# Altium PCB TEMP007-1P-2O.PcbDoc
Units mm, origin at the board's own origin, x right, y up, seen from the top; angles counter-clockwise.
Board outline 129.54 x 99.69 mm, 2 copper layers (Top Layer, Bottom Layer); 91 components, 48 nets, 228 pads, 19 vias.
Unrouted connection lines stored in the file: 167.
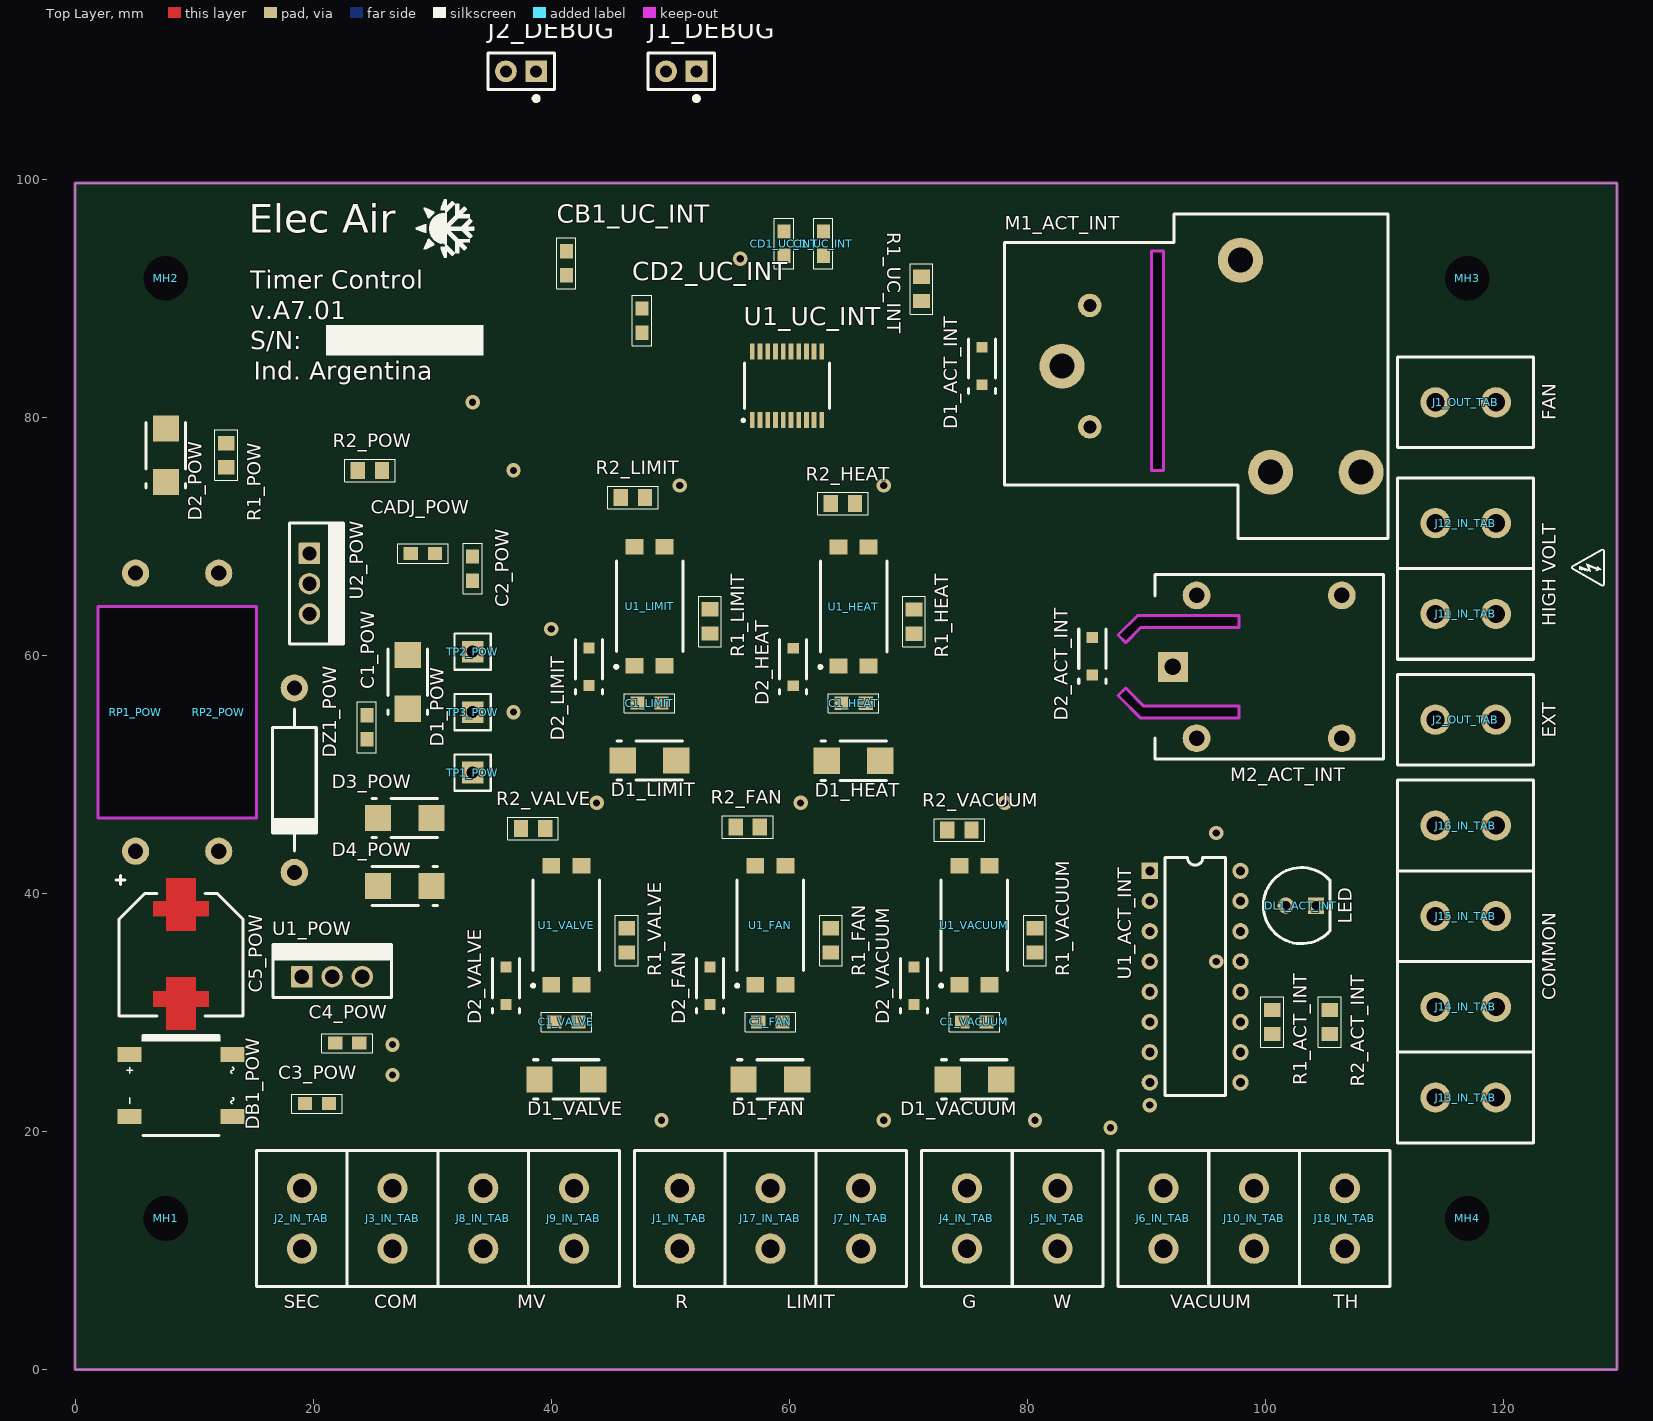
[diagram p0: Top Layer view]
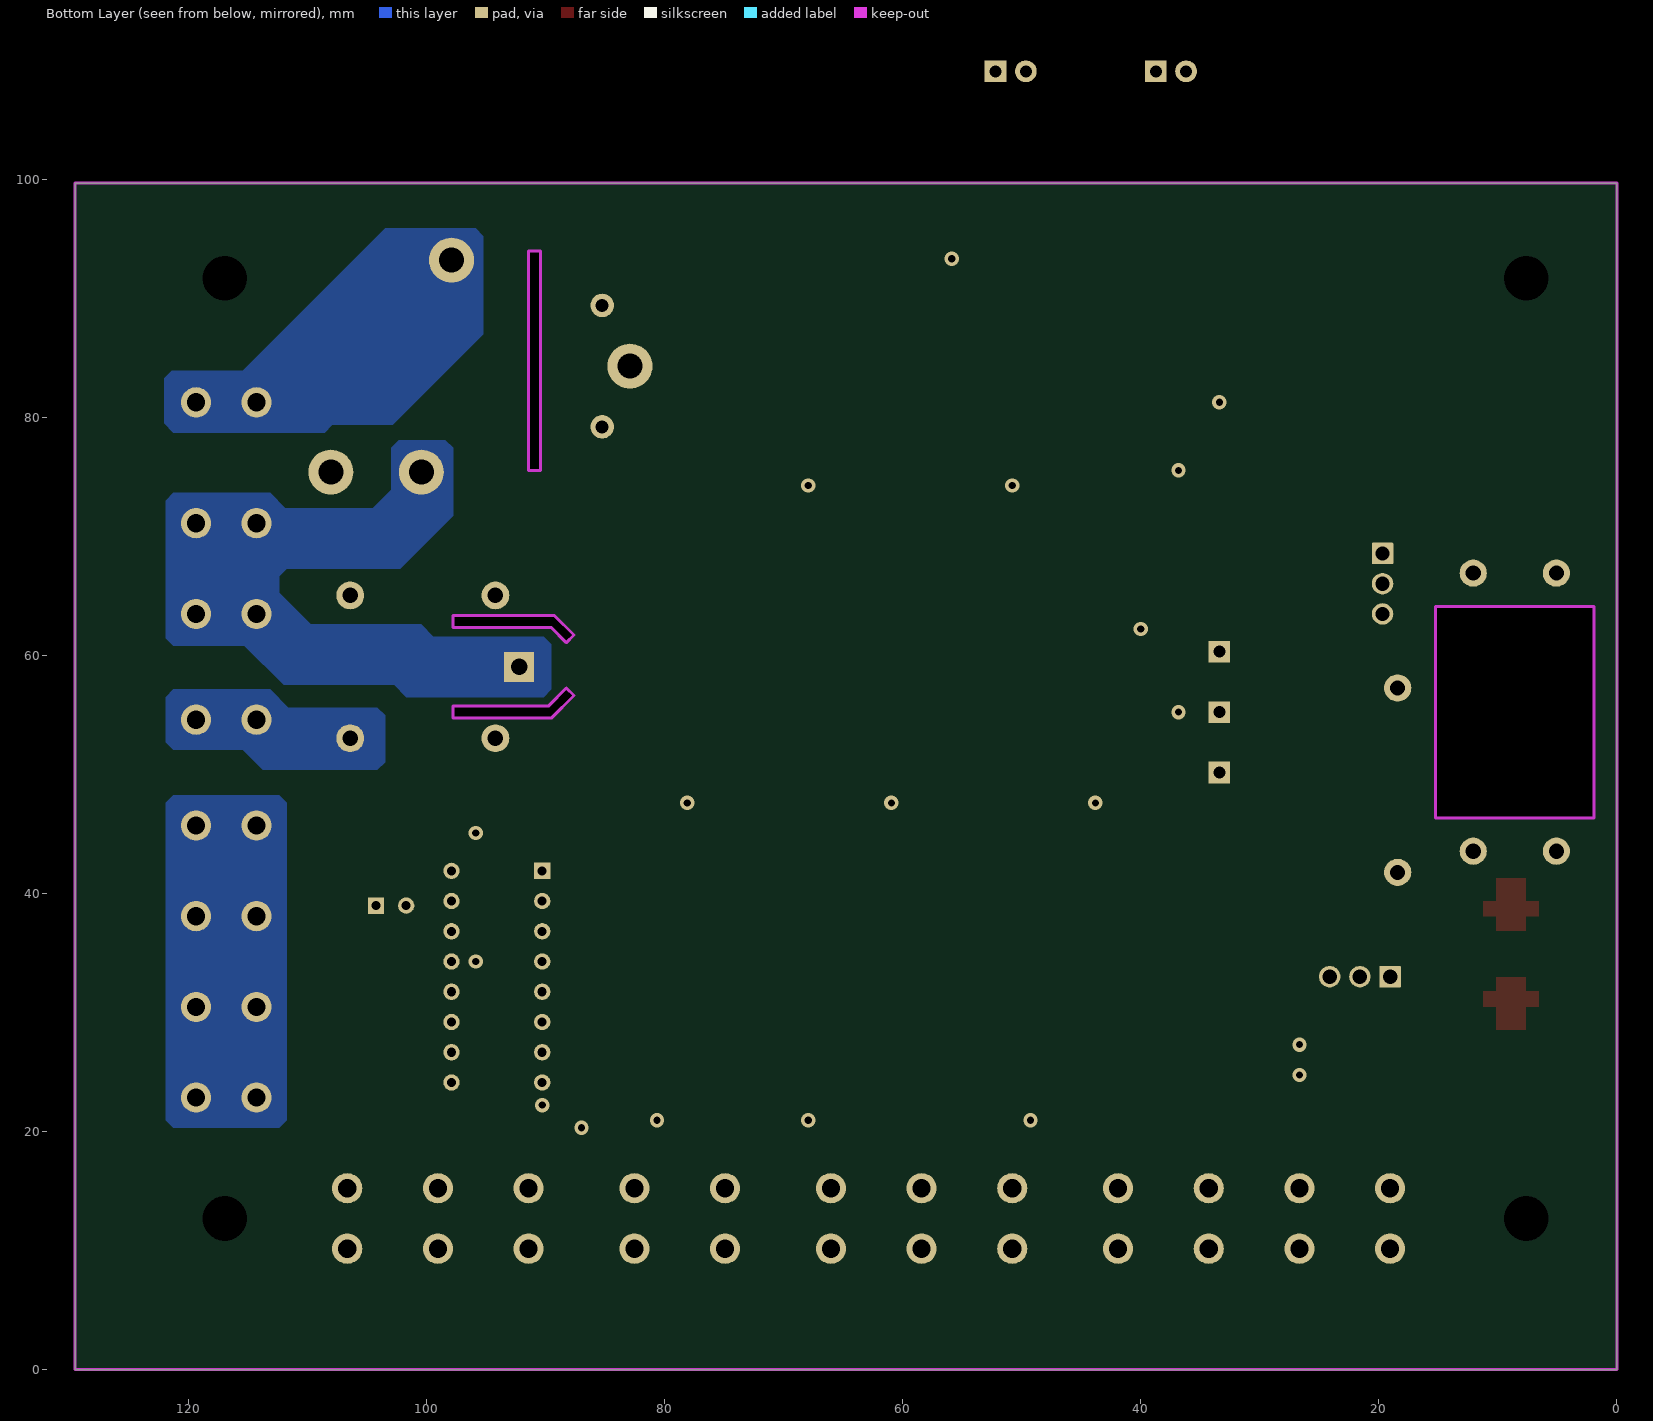
[diagram p1: Bottom Layer view, seen from below]

## Layer stack, top to bottom
Top Solder: solder mask 0.0102, Solder Resist, Dk 3.5
Top Layer: signal copper 0.0356
Dielectric 1: dielectric 0.32, FR-4, Dk 4.8
Bottom Layer: signal copper 0.0356
Bottom Solder: solder mask 0.0102, Solder Resist, Dk 3.5

## Board outline
0,0 129.54,0 129.54,99.695 0,99.695
cut-out: 88.265,61.087 89.535,62.357 97.79,62.357 97.79,63.373 89.281,63.373 87.63,61.722
cut-out: 87.63,56.642 89.535,54.737 97.79,54.737 97.79,55.753 89.789,55.753 88.265,57.277
cut-out: 90.424,75.565 90.424,93.98 91.44,93.98 91.44,75.565
cut-out: 1.905,46.355 1.905,64.135 15.24,64.135 15.24,46.355

## Design rules (kind name [scope] priority, off if disabled: settings)
BoardOutlineClearance [All] p1: gap=0.2 ignorepadtopadclearanceinfootprint=FALSE except(0.4: Arc-SplitBarrior Arc-SplitContinuation Track-SplitBarrior Track-SplitContinuation SMDPad-SplitBarrior SMDPad-SplitContinuation THPad-SplitBarrior THPad-SplitContinuation Via-SplitBarrior Via-SplitContinuation Fill-SplitBarrior Fill-SplitContinuation Poly-SplitBarrior Poly-SplitContinuation Region-SplitBarrior Region-SplitContinuation Text-SplitBarrior Text-SplitContinuation)
Clearance Clearance_Poly_Fiducials [InPolygon vs InComponentClass('Fiducials')] p1: gap=0.508 ignorepadtopadclearanceinfootprint=FALSE
Clearance Clearance_Poly_Tooling [InPolygon vs InComponentClass('Tooling')] p2: gap=0.254 ignorepadtopadclearanceinfootprint=FALSE
Clearance Clearance_Poly_THT [InPolygon vs InThruComponent] p3: gap=0.508 ignorepadtopadclearanceinfootprint=FALSE
Clearance Clearance_Poly_GRL [InPolygon vs IsVia] p4: gap=0.254 ignorepadtopadclearanceinfootprint=FALSE
Clearance "Clearance Bottom Layer" [OnLayer('Bottom Layer')] p5: gap=0.203 ignorepadtopadclearanceinfootprint=TRUE except(0.254: Arc-Text Track-Text SMDPad-Text THPad-Text Via-Text Fill-Text Poly-Text Region-Text Text-Text)
Clearance "Clearance Top Layer" [OnLayer('Top Layer')] p6: gap=0.203 ignorepadtopadclearanceinfootprint=TRUE except(0.254: Arc-Text Track-Text SMDPad-Text THPad-Text Via-Text Fill-Text Poly-Text Region-Text Text-Text)
Clearance [All] p7: gap=0.2 ignorepadtopadclearanceinfootprint=FALSE except(0.089: Arc-Arc Arc-Track Arc-SMDPad Track-Track Track-SMDPad SMDPad-SMDPad; 0.127: Arc-Via Track-Via SMDPad-Via THPad-Via Via-Via; 0.254: Arc-Text Track-Text SMDPad-Text THPad-Text Via-Text Fill-Text Poly-Text Region-Text Text-Text)
ComponentClearance MH [InComponentClass('MountHole') vs InComponentClass('Fiducials')  OR InComponentClass('Tooling')] p1: gap=-0.025 collisioncheckmode=3 verticalgap=-0.025 showdistances=FALSE
ComponentClearance [All] p2: gap=0.254 collisioncheckmode=3 verticalgap=0.254 showdistances=FALSE
HoleSize [All] p1: absolutevalues=TRUE maxlimit=6.3 minlimit=0.2 maxpercent=80.000 minpercent=20.000
MinimumAnnularRing [All] p1: minimumring=0.076
MinimumSolderMaskSliver [All] p1: minsoldermaskwidth=0.1
PolygonConnect [All] p1: thpad.connectstyle=Direct thpad.reliefconductorwidth=0.508 thpad.reliefentries=4 thpad.polygonreliefangle="90 Angle" thpad.airgapwidth=0.508 smdpad.connectstyle=Relief smdpad.reliefconductorwidth=0.508 smdpad.reliefentries=4 smdpad.polygonreliefangle="90 Angle" smdpad.airgapwidth=0.254 via.connectstyle=Direct via.reliefconductorwidth=0.508 via.reliefentries=4 via.polygonreliefangle="90 Angle" via.airgapwidth=0.254
RoutingCorners [All] p1: cornerstyle=Round minsetback=2.54 maxsetback=2.54
RoutingVias [All] p1: holewidth=0.5 width=1 viastyle="Through Hole" minholewidth=0.2 minwidth=0.45 maxholewidth=1 maxwidth=2
SilkToSilkClearance [All] p1: silktosilkclearance=0.1
SilkToSolderMaskClearance [IsPad] p1: minsilkscreentomaskgap=0.1 clearancetoexposedcopper=TRUE
SolderMaskExpansion [All] p1: expansion=0.102 istentingtop=FALSE
Width [All] p1: maxlimit=5.08 minlimit=0.152 preferedwidth=0.381
24 further rules are at their usual default settings.

## Classes and differential pairs
component class DEBUG: J1_DEBUG J2_DEBUG
channel class InputISO_Block: FAN HEAT LIMIT VACUUM VALVE
component class VALVE: C1_VALVE D1_VALVE D2_VALVE R1_VALVE R2_VALVE U1_VALVE
component class VACUUM: C1_VACUUM D1_VACUUM D2_VACUUM R1_VACUUM R2_VACUUM U1_VACUUM
component class UC_INT: C1_UC_INT CB1_UC_INT CD1_UC_INT CD2_UC_INT R1_UC_INT U1_UC_INT
component class Temporizador_V8_top: MH1 MH2 MH3 MH4
component class POW: C1_POW C2_POW C3_POW C4_POW C5_POW CADJ_POW D1_POW D2_POW D3_POW D4_POW DB1_POW DZ1_POW R1_POW R2_POW RP1_POW RP2_POW TP1_POW TP2_POW TP3_POW U1_POW U2_POW
component class OUT_TAB: J1_OUT_TAB J2_OUT_TAB
component class LIMIT: C1_LIMIT D1_LIMIT D2_LIMIT R1_LIMIT R2_LIMIT U1_LIMIT
component class IN_TAB: J1_IN_TAB J2_IN_TAB J3_IN_TAB J4_IN_TAB J5_IN_TAB J6_IN_TAB J7_IN_TAB J8_IN_TAB J9_IN_TAB J10_IN_TAB J11_IN_TAB J12_IN_TAB J13_IN_TAB J14_IN_TAB J15_IN_TAB J16_IN_TAB J17_IN_TAB J18_IN_TAB
component class HEAT: C1_HEAT D1_HEAT D2_HEAT R1_HEAT R2_HEAT U1_HEAT
component class FAN: C1_FAN D1_FAN D2_FAN R1_FAN R2_FAN U1_FAN
component class ACT_INT: D1_ACT_INT D2_ACT_INT DL1_ACT_INT M1_ACT_INT M2_ACT_INT R1_ACT_INT R2_ACT_INT U1_ACT_INT

## Components (designator, comment, footprint, x,y, rotation, side; value= is the part's Value field where it differs from the comment)
C1_FAN "10uF/50V" 0805-CAP-TDK 58.42,29.21 r0 top (schematic designator C1)
C1_HEAT "10uF/50V" 0805-CAP-TDK 65.405,55.994 r0 top (schematic designator C1)
C1_LIMIT "10uF/50V" 0805-CAP-TDK 48.26,56.007 r0 top (schematic designator C1)
C1_POW "0.1uF" 0805-CAP-TDK 24.511,53.975 r270 top (schematic designator C1)
C1_UC_INT "0.1uF" 0805-CAP-TDK 62.865,94.615 r270 top (schematic designator C1)
C1_VACUUM "10uF/50V" 0805-CAP-TDK 75.565,29.21 r0 top (schematic designator C1)
C1_VALVE "10uF/50V" 0805-CAP-TDK 41.275,29.21 r0 top (schematic designator C1)
C2_POW "0.1uF" 0805-CAP-TDK 33.401,67.31 r270 top (schematic designator C2)
C3_POW "0.33uF" 0805-CAP-TDK 20.32,22.352 r180 top (schematic designator C3)
C4_POW "0.1uF" 0805-CAP-TDK 22.86,27.432 r0 top (schematic designator C4)
C5_POW "100uFx63V" DIA10X10.2-CAP-SMD 8.89,34.925 r0 top (schematic designator C5)
CADJ_POW "10uF/50V" 0805-CAP-TDK 29.21,68.58 r0 top (schematic designator CADJ)
CB1_UC_INT "4.7uF/25V" 0805-CAP-TDK 41.275,92.964 r90 top (schematic designator CB1)
CD1_UC_INT "0.1uF" 0805-CAP-TDK 59.563,94.615 r270 top (schematic designator CD1)
CD2_UC_INT "0.1uF" 0805-CAP-TDK 47.625,88.138 r90 top (schematic designator CD2)
D1_ACT_INT "1N4148" SOD-123 76.2,84.328 r270 top (schematic designator D1)
D1_FAN "1N4007" DO-214AC-SMA 58.42,24.384 r180 top (schematic designator D1)
D1_HEAT "1N4007" DO-214AC-SMA 65.405,51.168 r180 top (schematic designator D1)
D1_LIMIT "1N4007" DO-214AC-SMA 48.26,51.181 r180 top (schematic designator D1)
D1_POW "1N4007" DO-214AC-SMA 27.94,57.785 r270 top (schematic designator D1)
D1_VACUUM "1N4007" DO-214AC-SMA 75.565,24.384 r180 top (schematic designator D1)
D1_VALVE "1N4007" DO-214AC-SMA 41.275,24.384 r180 top (schematic designator D1)
D2_ACT_INT "1N4148" SOD-123 85.471,59.944 r270 top (schematic designator D2)
D2_FAN "MMSZ18T1G" SOD-123 53.34,32.258 r270 top (schematic designator D2)
D2_HEAT "MMSZ18T1G" SOD-123 60.325,59.042 r270 top (schematic designator D2)
D2_LIMIT "MMSZ18T1G" SOD-123 43.18,59.055 r270 top (schematic designator D2)
D2_POW "1N4007" DO-214AC-SMA 7.62,76.835 r270 top (schematic designator D2)
D2_VACUUM "MMSZ18T1G" SOD-123 70.485,32.258 r270 top (schematic designator D2)
D2_VALVE "MMSZ18T1G" SOD-123 36.195,32.258 r270 top (schematic designator D2)
D3_POW "1N4007" DO-214AC-SMA 27.686,46.355 r180 top (schematic designator D3)
D4_POW "1N4007" DO-214AC-SMA 27.686,40.64 r0 top (schematic designator D4)
DB1_POW "DB107S" DBS 8.89,23.876 r90 top (schematic designator DB1)
DL1_ACT_INT "LED" "LED-5MM - BI" 102.997,38.989 r0 top (schematic designator DL1)
DZ1_POW "1N5349" DO40 18.415,49.53 r270 top (schematic designator DZ1)
J1_DEBUG "CON1X2" SIP1X2 50.927,109.093 r90 top (schematic designator J1)
J1_IN_TAB "R" TAB250 50.8,12.7 r90 top (schematic designator J1)
J1_OUT_TAB "FAN" TAB250 116.84,81.28 r180 top (schematic designator J1)
J2_DEBUG "CON1X2" SIP1X2 37.465,109.093 r90 top (schematic designator J2)
J2_IN_TAB "SEC" TAB250 19.05,12.7 r90 top (schematic designator J2)
J2_OUT_TAB "EXT" TAB250 116.84,54.61 r180 top (schematic designator J2)
J3_IN_TAB "COM" TAB250 26.67,12.7 r90 top (schematic designator J3)
J4_IN_TAB "G" TAB250 74.93,12.7 r90 top (schematic designator J4)
J5_IN_TAB "W" TAB250 82.55,12.7 r90 top (schematic designator J5)
J6_IN_TAB "W" TAB250 91.44,12.7 r90 top (schematic designator J6)
J7_IN_TAB "LIMIT" TAB250 66.04,12.7 r90 top (schematic designator J7)
J8_IN_TAB "MV" TAB250 34.29,12.7 r90 top (schematic designator J8)
J9_IN_TAB "MV" TAB250 41.91,12.7 r90 top (schematic designator J9)
J10_IN_TAB "VACUUM" TAB250 99.06,12.7 r90 top (schematic designator J10)
J11_IN_TAB "HIGH VOLT" TAB250 116.84,63.5 r180 top (schematic designator J11)
J12_IN_TAB "HIGH VOLT" TAB250 116.84,71.12 r180 top (schematic designator J12)
J13_IN_TAB "COMMON" TAB250 116.84,22.86 r180 top (schematic designator J13)
J14_IN_TAB "COMMON" TAB250 116.84,30.48 r180 top (schematic designator J14)
J15_IN_TAB "COMMON" TAB250 116.84,38.1 r180 top (schematic designator J15)
J16_IN_TAB "COMMON" TAB250 116.84,45.72 r180 top (schematic designator J16)
J17_IN_TAB "LIMIT" TAB250 58.42,12.7 r90 top (schematic designator J17)
J18_IN_TAB "TH" TAB250 106.68,12.7 r90 top (schematic designator J18)
M1_ACT_INT "FAN" HJQ-15F-FORM-C 82.517,84.318 r270 top locked (schematic designator M1)
M2_ACT_INT "EXT" HRJ-3FF-FORM-C 100.33,59.055 r0 top (schematic designator M2)
MH1 "MH-3.75MM" MH-3.75MM-NP 7.62,12.7 r0 top locked
MH2 "MH-3.75MM" MH-3.75MM-NP 7.62,91.694 r0 top locked
MH3 "MH-3.75MM" MH-3.75MM-NP 116.967,91.694 r0 top locked
MH4 "MH-3.75MM" MH-3.75MM-NP 116.967,12.7 r0 top
R1_ACT_INT "8K2/1%" 0805-RES-PANASONIC 100.584,29.21 r90 top (schematic designator R1)
R1_FAN "3K3/1%" 0805-RES-PANASONIC 63.5,36.068 r270 top (schematic designator R1)
R1_HEAT "3K3/1%" 0805-RES-PANASONIC 70.485,62.852 r270 top (schematic designator R1)
R1_LIMIT "3K3/1%" 0805-RES-PANASONIC 53.34,62.865 r270 top (schematic designator R1)
R1_POW "240/1%" 0805-RES-PANASONIC 12.7,76.835 r270 top (schematic designator R1)
R1_UC_INT "4K7/1%" 0805-RES-PANASONIC 71.12,90.805 r270 top (schematic designator R1)
R1_VACUUM "3K3/1%" 0805-RES-PANASONIC 80.645,36.068 r270 top (schematic designator R1)
R1_VALVE "3K3/1%" 0805-RES-PANASONIC 46.355,36.068 r270 top (schematic designator R1)
R2_ACT_INT "8K2/1%" 0805-RES-PANASONIC 105.41,29.21 r90 top (schematic designator R2)
R2_FAN "5K6/1%" 0805-RES-PANASONIC 56.515,45.593 r180 top (schematic designator R2)
R2_HEAT "5K6/1%" 0805-RES-PANASONIC 64.516,72.771 r180 top (schematic designator R2)
R2_LIMIT "5K6/1%" 0805-RES-PANASONIC 46.863,73.279 r180 top (schematic designator R2)
R2_POW "390/1%" 0805-RES-PANASONIC 24.765,75.552 r180 top (schematic designator R2)
R2_VACUUM "5K6/1%" 0805-RES-PANASONIC 74.295,45.339 r180 top (schematic designator R2)
R2_VALVE "5K6/1%" 0805-RES-PANASONIC 38.481,45.466 r180 top (schematic designator R2)
RP1_POW "390/3W" "RES1000 - NOSILK" 5.08,55.245 r90 top (schematic designator RP1)
RP2_POW "390/3W" "RES1000 - NOSILK" 12.065,55.245 r90 top (schematic designator RP2)
TP1_POW "+24V" "TPTH - PAD ONLY" 33.401,50.165 r270 top (schematic designator TP1)
TP2_POW "+3V3" "TPTH - PAD ONLY" 33.401,60.325 r90 top (schematic designator TP2)
TP3_POW "GND" "TPTH - PAD ONLY" 33.401,55.245 r90 top (schematic designator TP3)
U1_ACT_INT "ULN2003" DIP16 94.107,33.02 r0 top (schematic designator U1)
U1_FAN "TLP521-1" SMD-4P 58.42,37.338 r90 top (schematic designator U1)
U1_HEAT "TLP521-1" SMD-4P 65.405,64.122 r90 top (schematic designator U1)
U1_LIMIT "TLP521-1" SMD-4P 48.26,64.135 r90 top (schematic designator U1)
U1_POW "L7824ACV-DG" "TO-220 - DG" 21.59,33.02 r0 top (schematic designator U1)
U1_UC_INT "STM32F031F6P7" "ST-TSSOP-20 - STM32F031F6P7" 59.817,82.677 r90 top (schematic designator U1)
U1_VACUUM "TLP521-1" SMD-4P 75.565,37.338 r90 top (schematic designator U1)
U1_VALVE "TLP521-1" SMD-4P 41.275,37.338 r90 top (schematic designator U1)
U2_POW "LM317KCS" "TO-220 - KCS0003B" 19.685,66.04 r270 top (schematic designator U2)

## Footprints (in the part's own frame and the unit in brackets; to place one, negate y for a bottom-side part, rotate by r counter-clockwise, add the part's x,y. Pads: shape width x height; smd on the part's side, far side on the other; paste and mask are expansions set on the pad)
0805-CAP-TDK [mm]
  rect 1.2x1.1 smd: 1(-1.016,0) 2(1.016,0)
  silkscreen extent -2.12,-0.8 2.12,0.8, body extent -1,-0.63 1,0.63, height 1.45
0805-RES-PANASONIC [mm]
  rect 1.2x1.4 smd: 1(-1.016,0) 2(1.016,0)
  silkscreen extent -2.12,-0.95 2.12,0.95, body extent -1,-0.63 1,0.63, height 0.6
DBS [mil]
  rect 50x80 smd: 1(-102.36,-170) 2(102.36,170) 3(102.36,-170) 4(-102.36,170)
  silkscreen extent -165,-175 165,180, body extent -160,-195 160,195, height 106
DIA10X10.2-CAP-SMD [mil]
  round 1 smd: 1(0,163.39) 2(0,-163.39)
  Top Layer region: -92.52,124.02 -92.52,175.2 -49.21,175.2 -49.21,250 49.21,250 49.21,175.2 92.52,175.2 92.52,124.02 49.21,124.02 49.21,76.77 -49.21,76.77 -49.21,124.02
  Top Layer region: 92.52,-124.02 92.52,-175.2 49.21,-175.2 49.21,-250 -49.21,-250 -49.21,-175.2 -92.52,-175.2 -92.52,-124.02 -49.21,-124.02 -49.21,-76.77 49.21,-76.77 49.21,-124.02
  silkscreen extent -215,-205 205,260, body extent -203,-230 203,230, height 406
DIP16 [mil]
  rect 54x54 hole 30: 1(-150,350)
  round 54 hole 30: 2(-150,250) 3(-150,150) 4(-150,50) 5(-150,-50) 6(-150,-150) 7(-150,-250) 8(-150,-350) 9(150,-350) 10(150,-250) 11(150,-150) 12(150,-50) 13(150,50) 14(150,150) 15(150,250) 16(150,350)
  silkscreen extent -100,-394 100,394, body extent -153,-394 157,394, height 78
DO40 [mil]
  round 90 hole 50: 1(-305,0) 2(305,0)
  silkscreen extent -235,-73 235,73, body extent -324,-73 324,73, height 145
DO-214AC-SMA [mm]
  rect 2.2x2.2 smd: 1(-2.25,0) 2(2.25,0)
  silkscreen extent -2.75,-1.65 2.75,1.65, body extent -2.55,-1.33 2.55,1.33, height 2.3
HJQ-15F-FORM-C [mm]
  round 3.78 hole 2.1: 1C(0,0.404) 1S(-8.9,15.4) 3(8.9,17.94) 4(8.9,25.54)
  round 1.98 hole 1.1: 2(5.1,2.74) 5(-5.1,2.74)
  silkscreen extent -12.8,-4.45 14.48,27.8, body extent -12.8,-4.4 14.4,27.8, height 20.2
HRJ-3FF-FORM-C [mm]
  rect 2.52x2.52 hole 1.4: 1(-8.1,0)
  round 2.34 hole 1.3: 2(-6.1,-6) 3(6.1,-6) 4(6.1,6) 5(-6.1,6)
  silkscreen extent -9.6,-7.75 9.6,7.75, body extent -9.6,-7.75 9.6,7.75, height 14.7
"LED-5MM - BI" [mil]
  round 54 hole 30: 1(-50,0)
  rect 54x54 hole 30: 2(50,0)
  silkscreen extent -124,-126 96,126, body extent -114,-114 99,114, height 476
MH-3.75MM-NP [mm]
  round 3 hole 3.75: 1(0,0)
"RES1000 - NOSILK" [mil]
  round 90 hole 50: 1(-460,0) 2(460,0)
  body extent -477,-109 477,109, height 225
SIP1X2 [mil]
  rect 72x72 hole 40: 1(0,-50)
  round 72 hole 40: 2(0,50)
  silkscreen extent -100,-110 60,110, body extent -50,-105 50,100, height 330
SMD-4P [mm]
  rect 1.3x1.5 smd: 1(-5,1.27) 2(-5,-1.27) 3(5,-1.27) 4(5,1.27)
  silkscreen extent -5.21,-2.79 3.81,2.92, body extent -5.23,-2.55 5.23,2.55, height 4.35
SOD-123 [mm]
  rect 0.9x0.95 smd: 1(-1.575,0) 2(1.575,0)
  silkscreen extent -2.29,-1.14 2.29,1.14, body extent -1.83,-0.77 1.83,0.77, height 1.46
"ST-TSSOP-20 - STM32F031F6P7" [mm]
  rect 1.35x0.4 smd mask+0.05: 1(-2.875,2.925) 2(-2.875,2.275) 3(-2.875,1.625) 4(-2.875,0.975) 5(-2.875,0.325) 6(-2.875,-0.325) 7(-2.875,-0.975) 8(-2.875,-1.625) 9(-2.875,-2.275) 10(-2.875,-2.925) 11(2.875,-2.925) 12(2.875,-2.275) 13(2.875,-1.625) 14(2.875,-0.975) 15(2.875,-0.325) 16(2.875,0.325) 17(2.875,0.975) 18(2.875,1.625) 19(2.875,2.275) 20(2.875,2.925)
  silkscreen extent -3.02,-3.56 1.91,3.78, body extent -3.2,-3.25 3.2,3.25, height 1.23
TAB250 [mil]
  round 100 hole 60: 1(-100,0) 2(100,0)
  silkscreen extent -225,-150 225,150, body extent -156,-61 156,61, height 416
"TO-220 - DG" [mm]
  rrect6% 1.8x1.8 hole 1.2 mask+0.07: 1(-2.54,0)
  round 1.8 hole 1.2 mask+0.07: 2(0,0) 3(2.54,0)
  silkscreen extent -4.98,-1.76 4.98,2.69, body extent -4.98,-1.76 4.98,2.69, height 19.68
"TO-220 - KCS0003B" [mm]
  rrect6% 1.8x1.8 hole 1.2 mask+0.07: 1(-2.54,0)
  round 1.8 hole 1.2 mask+0.07: 2(0,0) 3(2.54,0)
  silkscreen extent -5.08,-1.68 5.08,2.88, body extent -5.08,-1.68 5.08,2.88, height 19.65
"TPTH - PAD ONLY" [mil]
  rect 72x72 hole 40: 1(0,0)
  silkscreen extent -60,-60 60,60

## Part data
C1_FAN C1_HEAT C1_LIMIT C1_POW C1_UC_INT C1_VACUUM C1_VALVE C2_POW C3_POW C4_POW CD1_UC_INT CD2_UC_INT: library part CAP-SMD
C5_POW: library part EEETG1J101UP, JLCPart=C178628
CADJ_POW: library part CAP-SMD, JLCPart=C440198
CB1_UC_INT: library part CAP-SMD, JLCPart=C1779
D1_ACT_INT D2_ACT_INT: "Diode Schottky 500mW"
D1_FAN D1_HEAT D1_LIMIT D1_POW D1_VACUUM D1_VALVE D2_POW D3_POW D4_POW: "Diode Rectifier 1A 1kV"
D2_FAN D2_HEAT D2_LIMIT D2_VACUUM D2_VALVE: "Diode Zener 18V"
DB1_POW: "Bridge Rectifier Single Phase Standard 1000 V Surface Mount 4-MiniDIP"
DL1_ACT_INT: library part LED-BI
DZ1_POW: library part "DIODE ZENER", "Diode Zener"
J1_IN_TAB J1_OUT_TAB J2_IN_TAB J2_OUT_TAB J3_IN_TAB J4_IN_TAB J5_IN_TAB J6_IN_TAB J7_IN_TAB J8_IN_TAB J9_IN_TAB J10_IN_TAB J11_IN_TAB J12_IN_TAB J13_IN_TAB J14_IN_TAB J15_IN_TAB J16_IN_TAB J17_IN_TAB J18_IN_TAB: library part TAB250
M1_ACT_INT: library part "RELE SIMPLE M"
M2_ACT_INT: library part "RELE SIMPLE"
R1_ACT_INT R1_FAN R1_HEAT R1_LIMIT R1_POW R1_UC_INT R1_VACUUM R1_VALVE R2_ACT_INT R2_FAN R2_HEAT R2_LIMIT R2_POW R2_VACUUM R2_VALVE: library part RES-SMD
RP1_POW RP2_POW: library part RES-THT
TP1_POW TP2_POW TP3_POW: library part TP
U1_FAN U1_HEAT U1_LIMIT U1_VACUUM U1_VALVE: library part TLP521-1XSM
U1_UC_INT: "ARM® Cortex®-M0 STM32F0 Microcontroller IC 32-Bit Single-Core 48MHz 32KB (32K x 8) FLASH 20-TSSOP"

## Via types
v1: diameter 1.2, hole 0.6, Top Layer to Bottom Layer, tented both sides, 19 vias

## Nets (pads, with @x,y where several pads share a name; then routed paths per layer and width w, separated by ;. In a path a pad name is that pad's centre, name@x,y a point inside that pad or via, vN(x,y) a via of type N, cw(c..) or ccw(c..) an arc to the next point about the centre after c; other vN are vias at no path point)
220V_AC: J11_IN_TAB.1 J11_IN_TAB.2 J12_IN_TAB.1 J12_IN_TAB.2 M1_ACT_INT.3 M2_ACT_INT.1
+3V3_DC: C2_POW.2 CB1_UC_INT.2 CD1_UC_INT.2 CD2_UC_INT.2 D1_POW.1 D2_POW.2 R1_POW.2 R1_UC_INT.1 TP2_POW.1 U1_FAN.4 U1_HEAT.4 U1_LIMIT.4 U1_UC_INT.5 U1_UC_INT.16 U1_VACUUM.4 U1_VALVE.4 U2_POW.2
  other v1: 40.005,62.23
+24V_DC: C4_POW.2 D1_ACT_INT.2 D2_ACT_INT.2 D3_POW.1 D4_POW.2 M1_ACT_INT.2 M2_ACT_INT.2 R1_ACT_INT.1 R2_ACT_INT.1 TP1_POW.1 U1_ACT_INT.9 U1_POW.3
  other v1: 86.995,20.32 26.67,27.305
EXT_220V: J2_OUT_TAB.1 J2_OUT_TAB.2 M2_ACT_INT.3
EXT_DRV: D2_ACT_INT.1 M2_ACT_INT.5 U1_ACT_INT.13
  other v1: 95.885,34.29 95.885,45.085
EXT_OUT: U1_ACT_INT.4 U1_UC_INT.8
FAN_220V: J1_OUT_TAB.1 J1_OUT_TAB.2 M1_ACT_INT.1S
FAN_DRV: D1_ACT_INT.1 M1_ACT_INT.5 U1_ACT_INT.14
FAN_OUT: U1_ACT_INT.3 U1_UC_INT.7
G_DIG: R2_FAN.2 U1_FAN.3 U1_UC_INT.12
G_IN: D1_FAN.1 J4_IN_TAB.1 J4_IN_TAB.2
GND: C1_POW.1 C1_UC_INT.1 C2_POW.1 C3_POW.1 C4_POW.1 C5_POW.2 CADJ_POW.1 CB1_UC_INT.1 CD1_UC_INT.1 CD2_UC_INT.1 D4_POW.1 DB1_POW.4 DZ1_POW.1 J2_DEBUG.2 R2_FAN.1 R2_HEAT.1 R2_LIMIT.1 R2_POW.1 R2_VACUUM.1 R2_VALVE.1 TP3_POW.1 U1_ACT_INT.8 U1_POW.2 U1_UC_INT.15
  other v1: 90.297,22.225 26.67,24.765 43.815,47.625 60.96,47.625 78.105,47.625 36.83,55.245 50.8,74.295 67.945,74.295 36.83,75.565 33.401,81.28 55.88,93.345
GREEN_CTRL: U1_ACT_INT.2 U1_UC_INT.10
GREEN_DRV: DL1_ACT_INT.1 R1_ACT_INT.2 U1_ACT_INT.15
LIMIT_DIG: R2_LIMIT.2 U1_LIMIT.3 U1_UC_INT.6
LIMIT_IN: D1_LIMIT.1 J7_IN_TAB.1 J7_IN_TAB.2
NetC1_FAN_2: C1_FAN.2 D1_FAN.2 D2_FAN.2
NetC1_HEAT_2: C1_HEAT.2 D1_HEAT.2 D2_HEAT.2
NetC1_LIMIT_2: C1_LIMIT.2 D1_LIMIT.2 D2_LIMIT.2
NetC1_POW_2: C1_POW.2 D1_POW.2 DZ1_POW.2 RP1_POW.2 RP2_POW.2 U2_POW.3
NetC1_VACUUM_2: C1_VACUUM.2 D1_VACUUM.2 D2_VACUUM.2
NetC1_VALVE_2: C1_VALVE.2 D1_VALVE.2 D2_VALVE.2
NetC3_POW_2: C3_POW.2 C5_POW.1 D3_POW.2 DB1_POW.2 RP1_POW.1 RP2_POW.1 U1_POW.1
NetCADJ_POW_2: CADJ_POW.2 D2_POW.1 R1_POW.1 R2_POW.2 U2_POW.1
NetD2_FAN_1: D2_FAN.1 R1_FAN.1
NetD2_HEAT_1: D2_HEAT.1 R1_HEAT.1
NetD2_LIMIT_1: D2_LIMIT.1 R1_LIMIT.1
NetD2_VACUUM_1: D2_VACUUM.1 R1_VACUUM.1
NetD2_VALVE_1: D2_VALVE.1 R1_VALVE.1
NetDB1_POW_1: DB1_POW.1 J1_IN_TAB.1 J1_IN_TAB.2 J2_IN_TAB.1 J2_IN_TAB.2 J17_IN_TAB.1 J17_IN_TAB.2
NetJ13_IN_TAB_1: J13_IN_TAB.1 J13_IN_TAB.2 J14_IN_TAB.1 J14_IN_TAB.2 J15_IN_TAB.1 J15_IN_TAB.2 J16_IN_TAB.1 J16_IN_TAB.2
NetR1_FAN_2: R1_FAN.2 U1_FAN.1
NetR1_HEAT_2: R1_HEAT.2 U1_HEAT.1
NetR1_LIMIT_2: R1_LIMIT.2 U1_LIMIT.1
NetR1_VACUUM_2: R1_VACUUM.2 U1_VACUUM.1
NetR1_VALVE_2: R1_VALVE.2 U1_VALVE.1
nRST: C1_UC_INT.2 J2_DEBUG.1 R1_UC_INT.2 U1_UC_INT.4
RED_CTRL: U1_ACT_INT.1 U1_UC_INT.11
RED_DRV: DL1_ACT_INT.2 R2_ACT_INT.2 U1_ACT_INT.16
RTN: C1_FAN.1 C1_HEAT.1 C1_LIMIT.1 C1_VACUUM.1 C1_VALVE.1 DB1_POW.3 J3_IN_TAB.1 J3_IN_TAB.2 U1_FAN.2 U1_HEAT.2 U1_LIMIT.2 U1_VACUUM.2 U1_VALVE.2
  other v1: 49.276,20.955 67.945,20.955 80.645,20.955
SWCLK: J1_DEBUG.2 U1_UC_INT.20
SWDIO: J1_DEBUG.1 U1_UC_INT.19
VACUUM_DIG: R2_VACUUM.2 U1_UC_INT.17 U1_VACUUM.3
VACUUM_IN: D1_VACUUM.1 J10_IN_TAB.1 J10_IN_TAB.2 J18_IN_TAB.1 J18_IN_TAB.2
VALVE_DIG: R2_VALVE.2 U1_UC_INT.9 U1_VALVE.3
VALVE_IN: D1_VALVE.1 J8_IN_TAB.1 J8_IN_TAB.2 J9_IN_TAB.1 J9_IN_TAB.2
W_DIG: R2_HEAT.2 U1_HEAT.3 U1_UC_INT.13
W_IN: D1_HEAT.1 J5_IN_TAB.1 J5_IN_TAB.2 J6_IN_TAB.1 J6_IN_TAB.2
pads on no net: M1_ACT_INT.1C M1_ACT_INT.4 M2_ACT_INT.4 MH1.1 MH2.1 MH3.1 MH4.1 U1_ACT_INT.5 U1_ACT_INT.6 U1_ACT_INT.7 U1_ACT_INT.10 U1_ACT_INT.11 U1_ACT_INT.12 U1_UC_INT.1 U1_UC_INT.2 U1_UC_INT.3 U1_UC_INT.14 U1_UC_INT.18

## Polygon pours and split planes (outlines as drawn)
220V_AC on Bottom Layer "220V_AC_L02_P003" (solid, pour order 3): 112.395,66.675 111.76,67.31 102.235,67.31 97.79,71.755 97.79,77.47 98.425,78.105 102.362,78.105 102.997,77.47 102.997,73.914 104.521,72.39 111.887,72.39 113.157,73.66 121.285,73.66 121.92,73.025 121.92,61.468 121.285,60.833 115.316,60.833 112.014,57.531 102.743,57.531 101.727,56.515 90.17,56.515 89.535,57.15 89.535,60.96 90.17,61.595 99.441,61.595 100.457,62.611 109.728,62.611 112.395,65.278
EXT_220V on Bottom Layer "EXT_220V_L02_P002" (solid, pour order 2): 104.14,50.419 103.505,51.054 103.505,54.991 104.14,55.626 111.633,55.626 113.157,57.15 121.285,57.15 121.92,56.515 121.92,52.705 121.285,52.07 115.443,52.07 113.792,50.419
NetJ13_IN_TAB_1 on Bottom Layer "NETJ13_IN_TAB_1_L02_P001" (solid, pour order 1): 112.395,48.26 111.76,47.625 111.76,20.955 112.395,20.32 121.285,20.32 121.92,20.955 121.92,47.625 121.285,48.26
FAN_220V on Bottom Layer "FAN_220V_L02_P000" (solid, pour order 0): 107.95,79.375 102.87,79.375 95.25,86.995 95.25,95.25 95.885,95.885 103.505,95.885 115.443,83.947 121.412,83.947 122.047,83.312 122.047,79.502 121.285,78.74 108.585,78.74

## Keep-outs
Keep-Out Layer:
  pour cut-out: 87.63,56.642 89.535,54.737 97.79,54.737 97.79,55.753 89.789,55.753 88.265,57.277
  lines w0.254: 0,0 0,99.695 129.54,99.695 129.54,0 0,0 ; 1.905,46.355 1.905,64.135 15.24,64.135 15.24,46.355 1.905,46.355 ; 87.63,56.642 88.265,57.277 89.789,55.753 97.79,55.753 97.79,54.737 89.535,54.737 87.63,56.642 ; 87.63,61.722 88.265,61.087 89.535,62.357 97.79,62.357 97.79,63.373 89.281,63.373 87.63,61.722 ; 90.424,75.565 91.44,75.565 91.44,81.28 91.44,93.98 90.424,93.98 90.424,80.899 90.424,75.565

## Silkscreen, mask and mechanical layers (free items; w line width, h text height)
Top Overlay:
  drawing of 10 lines, arcs and shapes, not listed
  text "Elec Air" at 14.605,94.742 h4.1
  text "Timer Control" at 14.732,90.805 h1.52
  text "v.A7.01" at 14.732,88.265 h1.52
  text "S/N:" at 14.732,85.725 h1.52
  text "Ind. Argentina" at 14.986,83.185 h1.52